# EAGLE board pi3_hat (EAGLE 6.5.0)
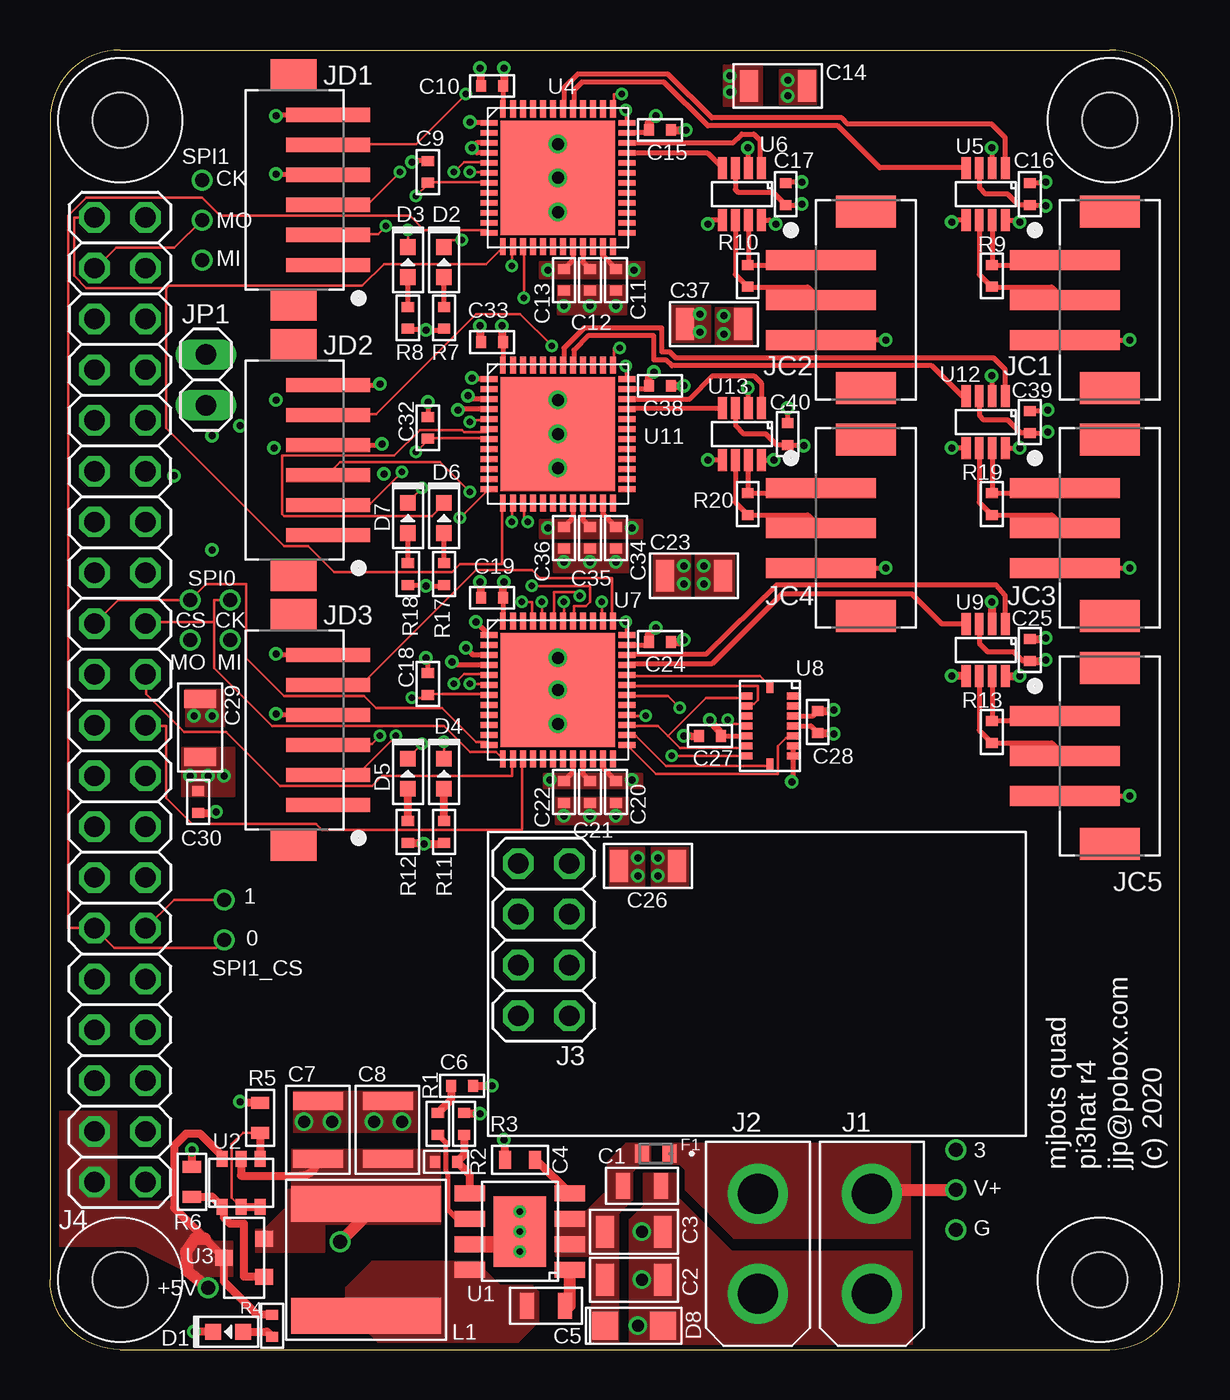
[diagram p0: board, top side]
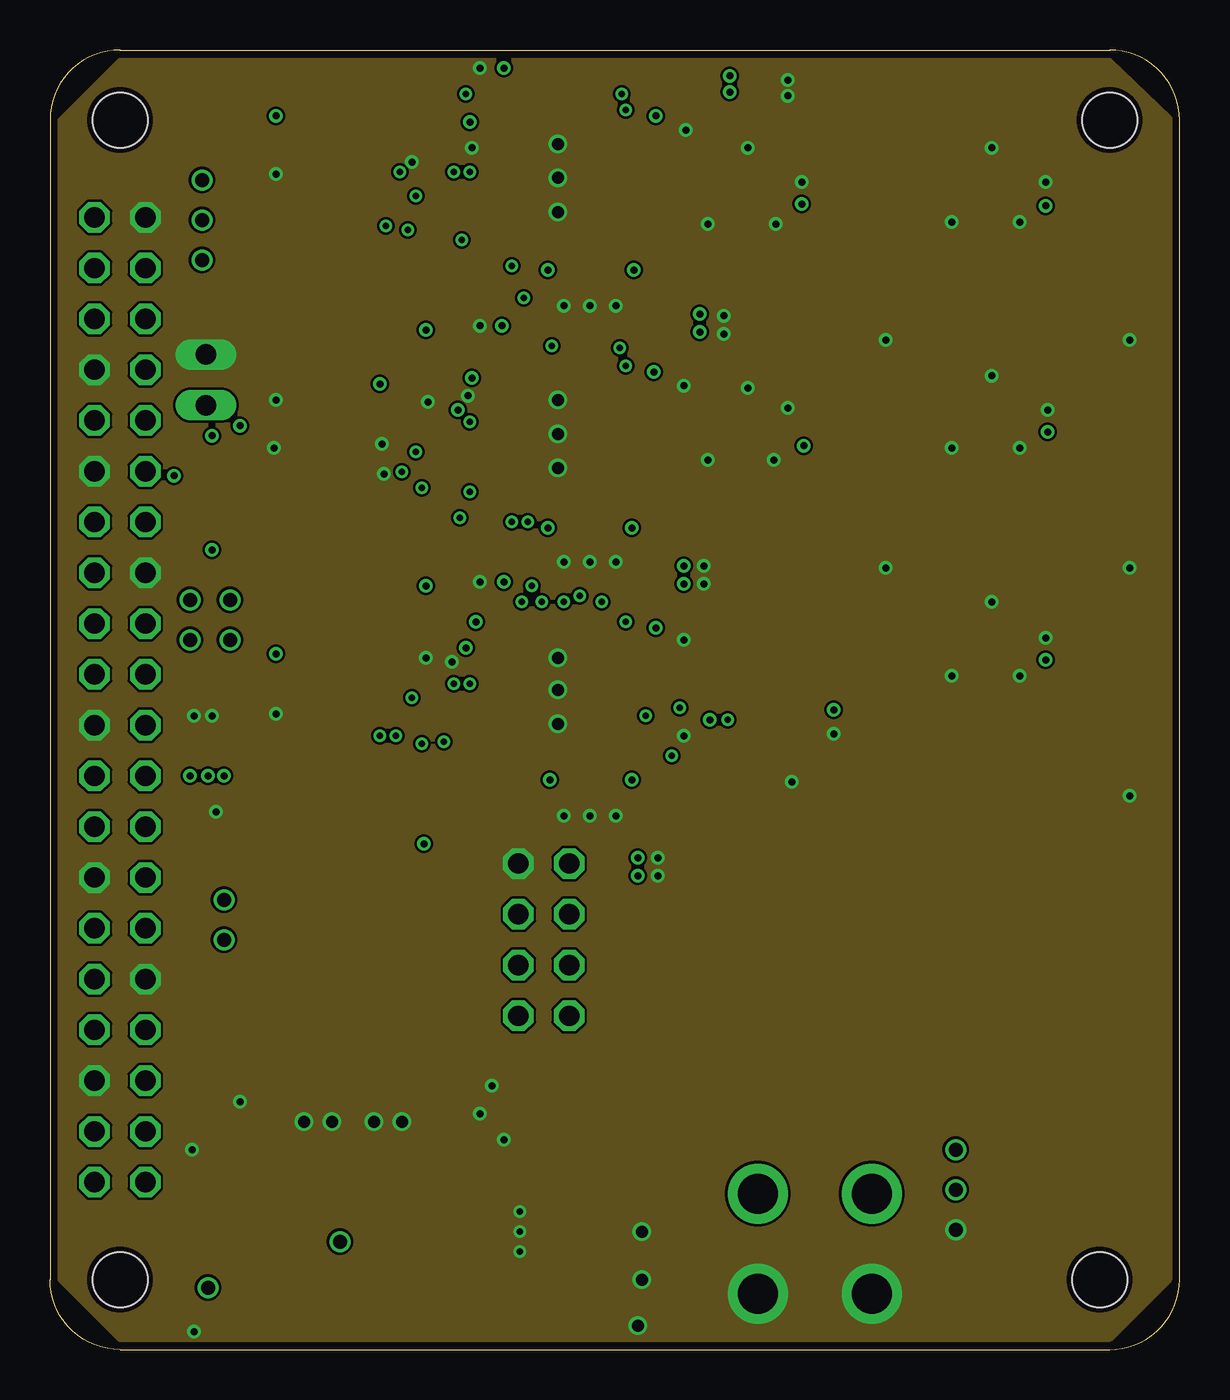
[diagram p1: board, inner layer Route2]
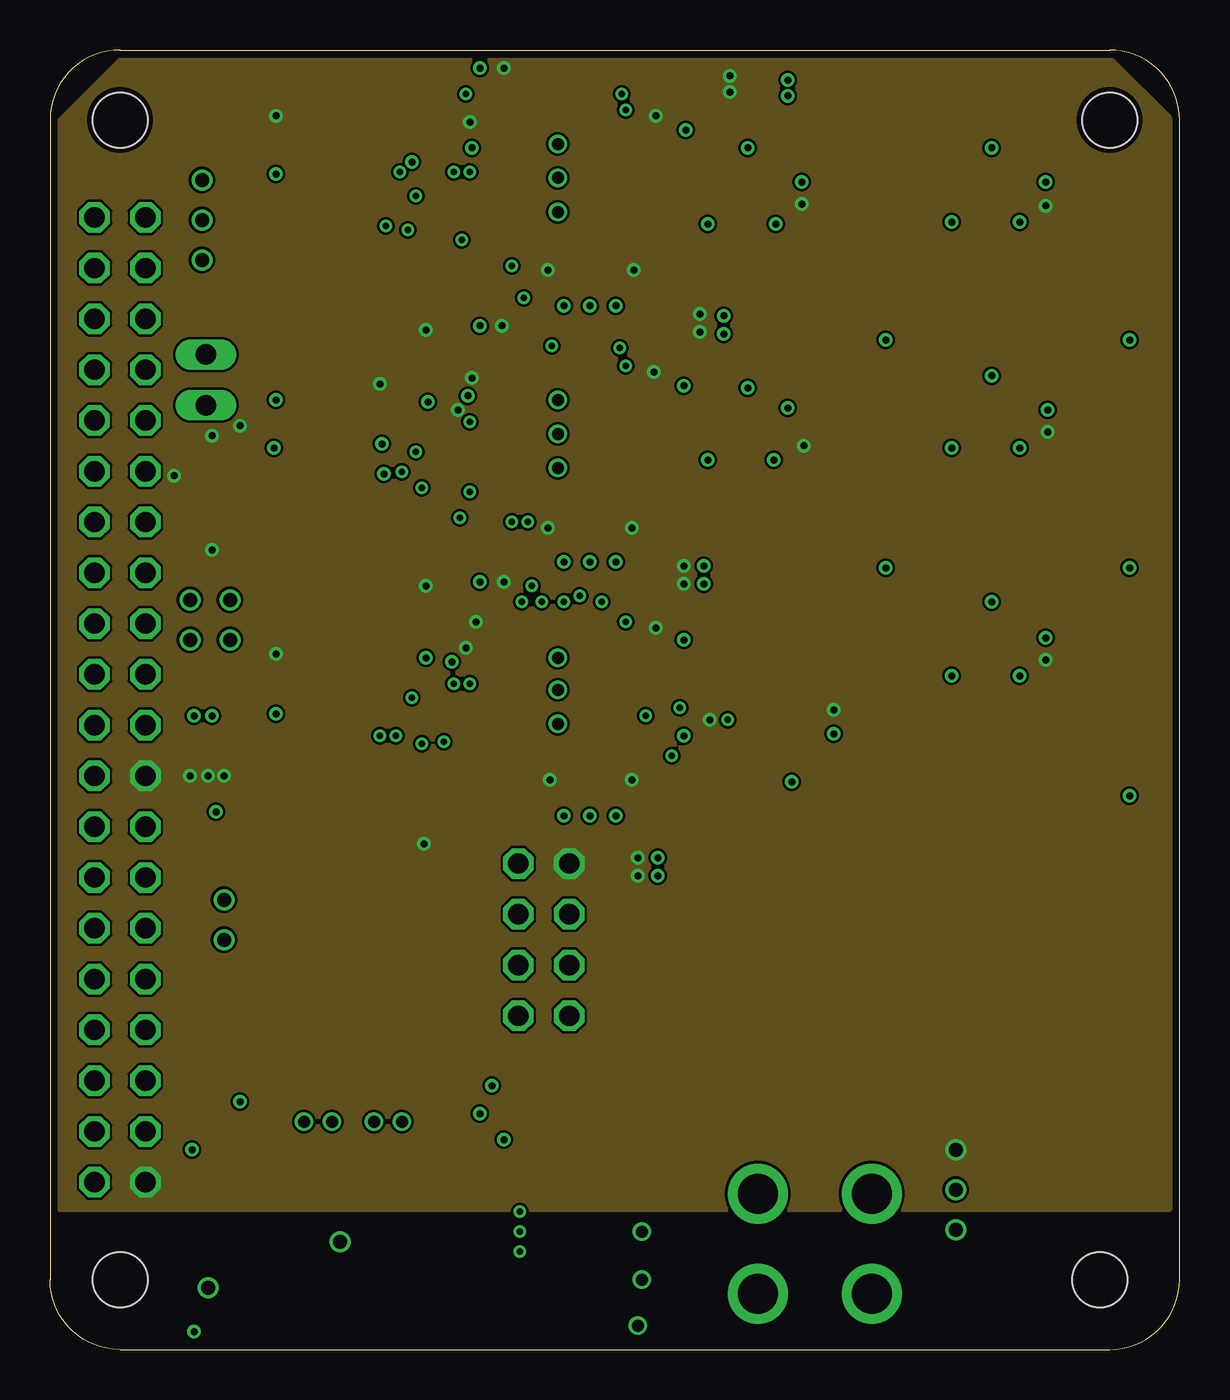
[diagram p2: board, inner layer Route15]
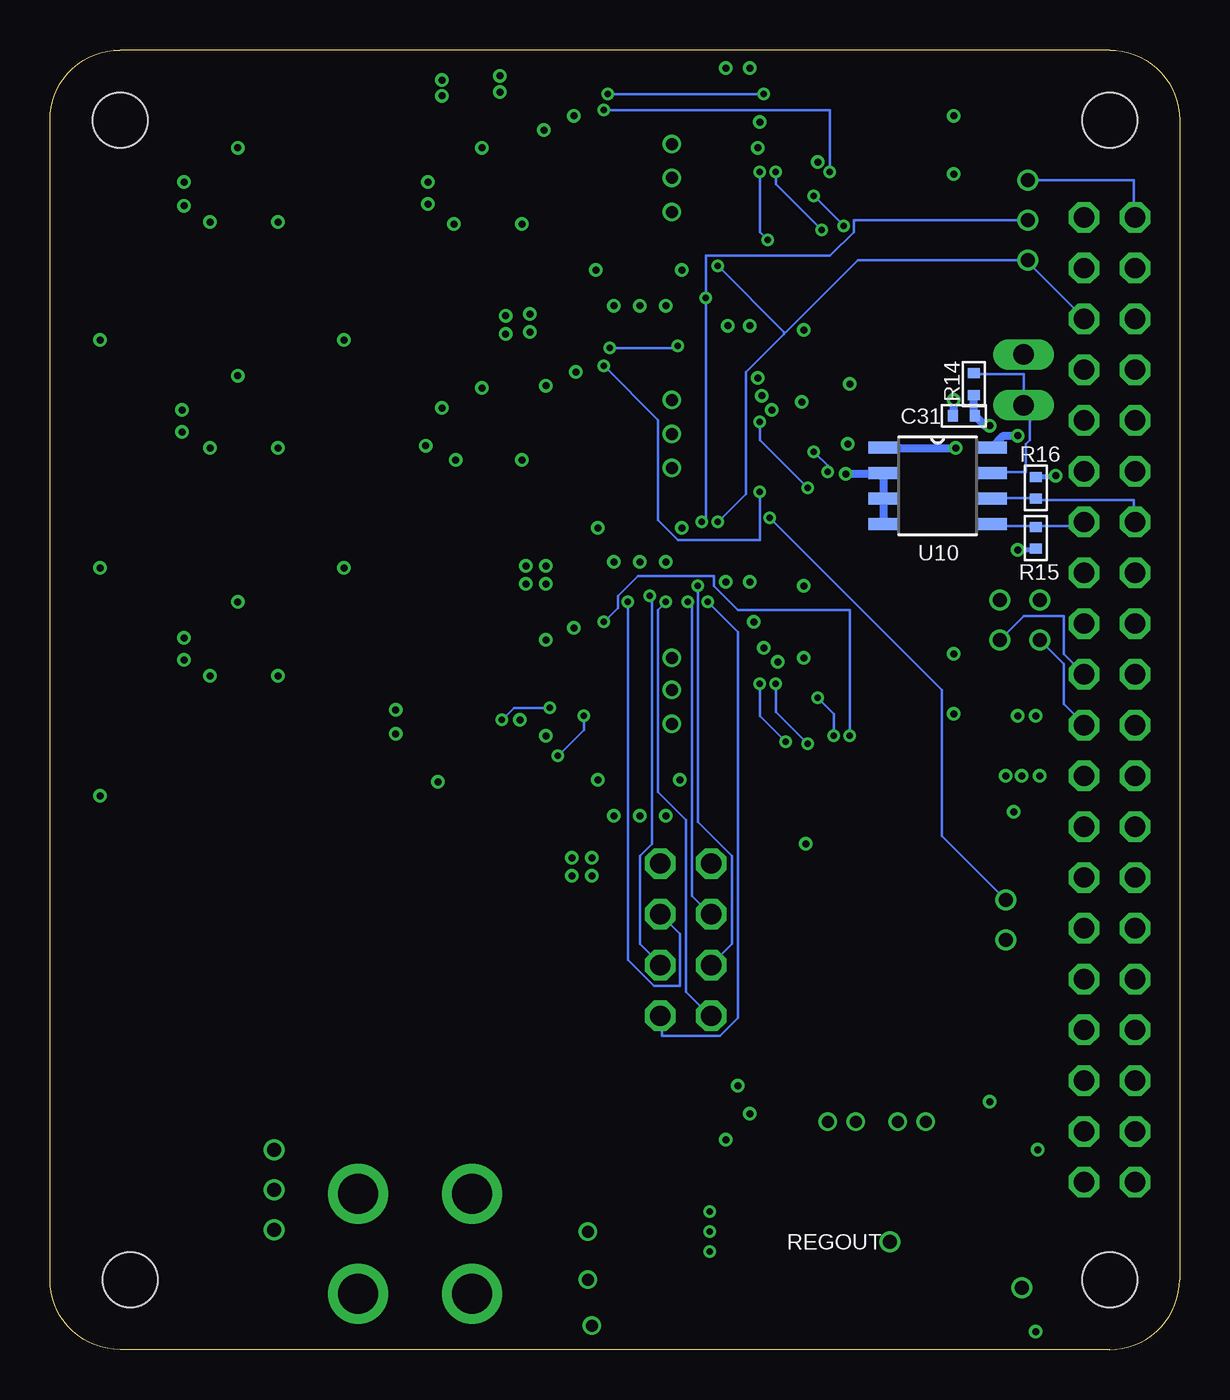
[diagram p3: board, bottom side, seen from below]

Size 56.5 x 65 mm. Coordinates in mm from the lower left corner, seen from the top.
Outline: 3.5,0 53,0 arc90 56.5,3.5 56.5,61.5 arc90 53,65 3.5,65 arc90 0,61.5 0,3.5 arc90 3.5,0
Copper layers (1*2*15*16): Top 0.035mm / dielectric 0.23mm / Route2 0.035mm / dielectric 0.93mm / Route15 0.035mm / dielectric 0.23mm / Bottom 0.035mm
Design rules "MF_Standard_4_Layer": minimum track width 5mil, minimum drill 12mil, track to track 5mil, track to pad 5mil, pad to pad 5mil, via to via 5mil, smd to smd 0mil, copper to edge 10mil, drill to drill 10mil, minimum pad ring 6mil, minimum via ring 6mil, stop-mask expansion 2mil, vias tented up to drill 25mil, thermal gap 10mil
Holes 2.75 mm at 3.5,3.5 3.5,61.5 53,61.5 52.5,3.5

## Footprints (pad centres in the part's own frame; a part is rotated, then mirrored left to right if it is on the bottom)
24AWG_PAD = drill 0.7: P$1 0,0
C0805 = smd 0.7 x 1.3: P$1 -0.95,0; P$2 0.95,0
C1206 = smd 0.9 x 1.6: P$1 -1.45,0; P$2 1.45,0
C0603 = smd 0.6 x 0.9: P$1 -0.75,0; P$2 0.75,0
C0402 = smd 0.5 x 0.6: P$1 -0.55,0; P$2 0.55,0
C1210 = smd 0.9 x 2.5: P$1 -1.45,0; P$2 1.45,0
LED0603 = smd 0.8 x 0.8: ANODE 0.75,0; CATHODE -0.75,0
SMF = smd 1.3 x 1.4: A 1.45,0; C -1.45,0
FUS_VISHAY_MFU0603 = smd 0.699 x 0.94: 1 -0.679,0; 2 0.679,0
XT30P = drill 2: 1 -2.5,0; 2 2.5,0
2X04 = drill 1.016 octagon: 1 -3.81,-1.27; 2 -3.81,1.27; 3 -1.27,-1.27; 4 -1.27,1.27; 5 1.27,-1.27; 6 1.27,1.27; 7 3.81,-1.27; 8 3.81,1.27
2X20 = drill 1.016 octagon: 1 -24.13,-1.27; 2 -24.13,1.27; 3 -21.59,-1.27; 4 -21.59,1.27; 5 -19.05,-1.27; 6 -19.05,1.27; 7 -16.51,-1.27; 8 -16.51,1.27; 9 -13.97,-1.27; 10 -13.97,1.27; 11 -11.43,-1.27; 12 -11.43,1.27; 13 -8.89,-1.27; 14 -8.89,1.27; 15 -6.35,-1.27; 16 -6.35,1.27; 17 -3.81,-1.27; 18 -3.81,1.27; 19 -1.27,-1.27; 20 -1.27,1.27; 21 1.27,-1.27; 22 1.27,1.27; 23 3.81,-1.27; 24 3.81,1.27; 25 6.35,-1.27; 26 6.35,1.27; 27 8.89,-1.27; 28 8.89,1.27; 29 11.43,-1.27; 30 11.43,1.27; 31 13.97,-1.27; 32 13.97,1.27; 33 16.51,-1.27; 34 16.51,1.27; 35 19.05,-1.27; 36 19.05,1.27; 37 21.59,-1.27; 38 21.59,1.27; 39 24.13,-1.27; 40 24.13,1.27
JST_B3B_PH-SM4-TB(LF)(SN) = smd 1 x 5.5: 1 -2,-2.54; 2 0,-2.54; 3 2,-2.54 | smd 1.6 x 3: P1 -4.4,-0.29; P2 4.4,-0.29
JST_B6B-ZR-SM4-TF(LF)(SN) = smd 0.7 x 4.2: 1 -3.75,-2; 2 -2.25,-2; 3 -0.75,-2; 4 0.75,-2; 5 2.25,-2; 6 3.75,-2 | smd 1.5 x 2.3: P1 -5.8,-0.29; P2 5.8,-0.29
1X02 = drill 1.016 long: 1 -1.27,0; 2 1.27,0
TAIYO_8040 = smd 1.8 x 7.5: 1 -2.8,0; 2 2.8,0
R0402 = smd 0.5 x 0.6: P$1 -0.55,0; P$2 0.55,0
R0603 = smd 0.6 x 0.9: P$1 -0.75,0; P$2 0.75,0
SO-8EP = smd 0.802 x 1.505: 1 -1.905,-2.5; 2 -0.635,-2.5; 3 0.635,-2.5; 4 1.905,-2.5; 5 1.905,2.5; 6 0.635,2.5; 7 -0.635,2.5; 8 -1.905,2.5 | drill 0.305: P1 -1,0; P2 0,0; P3 1,0 | smd 3.502 x 2.613: PAD 0,0
SOT26 = smd 0.55 x 0.8: 1 -0.95,-1.2; 2 0,-1.2; 3 0.95,-1.2; 4 0.95,1.2; 5 0,1.2; 6 -0.95,1.2
SOT23 = smd 0.8 x 0.9: 1 -0.95,-1; 2 0.95,-1; 3 0,1
QFN50P700X700X60-49N = smd 0.85 x 0.3: 1 -3.45,2.75; 2 -3.45,2.25; 3 -3.45,1.75; 4 -3.45,1.25; 5 -3.45,0.75; 6 -3.45,0.25; 7 -3.45,-0.25; 8 -3.45,-0.75; 9 -3.45,-1.25; 10 -3.45,-1.75; 11 -3.45,-2.25; 12 -3.45,-2.75; 25 3.45,-2.75; 26 3.45,-2.25; 27 3.45,-1.75; 28 3.45,-1.25; 29 3.45,-0.75; 30 3.45,-0.25; 31 3.45,0.25; 32 3.45,0.75; 33 3.45,1.25; 34 3.45,1.75; 35 3.45,2.25; 36 3.45,2.75 | smd 0.3 x 0.85: 13 -2.75,-3.45; 14 -2.25,-3.45; 15 -1.75,-3.45; 16 -1.25,-3.45; 17 -0.75,-3.45; 18 -0.25,-3.45; 19 0.25,-3.45; 20 0.75,-3.45; 21 1.25,-3.45; 22 1.75,-3.45; 23 2.25,-3.45; 24 2.75,-3.45; 37 2.75,3.45; 38 2.25,3.45; 39 1.75,3.45; 40 1.25,3.45; 41 0.75,3.45; 42 0.25,3.45; 43 -0.25,3.45; 44 -0.75,3.45; 45 -1.25,3.45; 46 -1.75,3.45; 47 -2.25,3.45; 48 -2.75,3.45 | smd 5.7 x 5.7: 49 0,0
SOT23-8 = smd 0.45 x 1.1: 1 -0.975,-1.3; 2 -0.325,-1.3; 3 0.325,-1.3; 4 0.975,-1.3; 5 0.975,1.3; 6 0.325,1.3; 7 -0.325,1.3; 8 -0.975,1.3
LGA16 = smd 0.35 x 0.575: 1 -1.5,1.16; 2 -1,1.16; 3 -0.5,1.16; 4 0,1.16; 5 0.5,1.16; 6 1,1.16; 7 1.5,1.16; 9 1.5,-1.16; 10 1,-1.16; 11 0.5,-1.16; 12 0,-1.16; 13 -0.5,-1.16; 14 -1,-1.16; 15 -1.5,-1.16 | smd 0.575 x 0.35: 8 1.915,0; 16 -1.915,0
SOIC8 = smd 1.549 x 0.61: 1 -2.7,1.905; 2 -2.7,0.635; 3 -2.7,-0.635; 4 -2.7,-1.905; 5 2.7,-1.905; 6 2.7,-0.635; 7 2.7,0.635; 8 2.7,1.905

## Placement (x,y rotation side)
3V3_TP  PAD24AWG_PAD  [24AWG_PAD]  45.3,10 0 top
+5V  PAD24AWG_PAD  [24AWG_PAD]  7.9,3.1 0 top
C1  .1uF 50V  [C0805]  29.6,8.2 0 top
C2  10uF 50V  [C1206]  29.2,3.5 0 top
C3  10uF 50V  [C1206]  29.2,5.9 0 top
C4  0.01uF  [C0603]  23.5,9.5 180 top
C5  .1uF 50V  [C0805]  24.8,2.2 180 top
C6  4.7nF  [C0402]  20.6,13.2 0 top
C7  22uF 16V  [C1210]  13.4,11 90 top
C8  22uF 16V  [C1210]  16.9,11 90 top
C9  0.1uF  [C0402]  18.9,58.9 90 top
C10  0.1uF  [C0402]  22.1,63.2 180 top
C11  1uF  [C0402]  28.3,53.5 270 top
C12  0.1uF  [C0402]  27,53.5 270 top
C13  0.1uF  [C0402]  25.7,53.5 270 top
C14  10uF  [C1206]  36.4,63.2 0 top
C15  0.1uF  [C0402]  30.5,61 0 top
C16  0.1uF  [C0402]  49,57.8 90 top
C17  0.1uF  [C0402]  36.8,57.8 90 top
C18  0.1uF  [C0402]  18.9,33.3 90 top
C19  0.1uF  [C0402]  22.1,37.6 180 top
C20  1uF  [C0402]  28.3,27.9 270 top
C21  0.1uF  [C0402]  27,27.9 270 top
C22  0.1uF  [C0402]  25.7,27.9 270 top
C23  10uF  [C1206]  32.2,38.7 0 top
C24  0.1uF  [C0402]  30.5,35.4 0 top
C25  0.1uF  [C0402]  49,35 90 top
C26  10uF  [C1206]  29.9,24.2 0 top
C27  0.1uF  [C0402]  33,30.7 180 top
C28  0.1uF  [C0402]  38.4,31.4 270 top
C29  10uF  [C1206]  7.5,31.1 90 top
C30  0.1uF  [C0402]  7.4,27.4 270 top
C31  0.1uF  [C0402]  10.8,46.7 180 bottom
C32  0.1uF  [C0402]  18.9,46.1 90 top
C33  0.1uF  [C0402]  22.1,50.4 180 top
C34  1uF  [C0402]  28.3,40.6 270 top
C35  0.1uF  [C0402]  27,40.6 270 top
C36  0.1uF  [C0402]  25.7,40.6 270 top
C37  10uF  [C1206]  33.2,51.3 0 top
C38  0.1uF  [C0402]  30.5,48.2 0 top
C39  0.1uF  [C0402]  49,46.4 90 top
C40  0.1uF  [C0402]  36.9,45.8 90 top
D1  MF-LED-0603-RED  [LED0603]  8.9,0.9 0 top
D2  MF-LED-0603-RED  [LED0603]  19.7,54.4 270 top
D3  MF-LED-0603-RED  [LED0603]  17.9,54.4 270 top
D4  MF-LED-0603-RED  [LED0603]  19.7,28.8 270 top
D5  MF-LED-0603-RED  [LED0603]  17.9,28.8 270 top
D6  MF-LED-0603-RED  [LED0603]  19.7,41.6 270 top
D7  MF-LED-0603-RED  [LED0603]  17.9,41.6 270 top
D8  36V  [SMF]  29.2,1.2 0 top
F1  MFU0603FF04000P100  [FUS_VISHAY_MFU0603]  30.3,9.8 180 top
GND  PAD24AWG_PAD  [24AWG_PAD]  45.3,6 0 top
J1  XT30P  [XT30P]  41.1,5.3 90 top
J2  XT30P  [XT30P]  35.4,5.3 90 top
J3  [2X04]  24.7,20.5 90 top
J4  [2X20]  3.5,32.5 90 top
JC1  JST-PH3SMT_VERT  [JST_B3B_PH-SM4-TB(LF)(SN)]  53.3,52.5 270 top
JC2  JST-PH3SMT_VERT  [JST_B3B_PH-SM4-TB(LF)(SN)]  41.1,52.5 270 top
JC3  JST-PH3SMT_VERT  [JST_B3B_PH-SM4-TB(LF)(SN)]  53.3,41.1 270 top
JC4  JST-PH3SMT_VERT  [JST_B3B_PH-SM4-TB(LF)(SN)]  41.1,41.1 270 top
JC5  JST-PH3SMT_VERT  [JST_B3B_PH-SM4-TB(LF)(SN)]  53.3,29.7 270 top
JD1  JST-ZH6SMT_VERT  [JST_B6B-ZR-SM4-TF(LF)(SN)]  11.9,58 90 top
JD2  JST-ZH6SMT_VERT  [JST_B6B-ZR-SM4-TF(LF)(SN)]  11.9,44.5 90 top
JD3  JST-ZH6SMT_VERT  [JST_B6B-ZR-SM4-TF(LF)(SN)]  11.9,31 90 top
JP1  [1X02]  7.8,48.5 270 top
L1  6.8uH 3.7A  [TAIYO_8040]  15.8,4.5 90 top
R1  15k  [R0402]  19.4,11.3 90 top
R2  115k  [R0402]  19.8,9.4 0 top
R3  22.1k  [R0402]  20.7,11.3 90 top
R4  560  [R0402]  11.1,1.2 270 top
R5  10k 1%  [R0603]  10.5,11.6 90 top
R6  53.6k 1%  [R0603]  7.1,8.4 90 top
R7  220  [R0402]  19.7,51.6 90 top
R8  220  [R0402]  17.9,51.6 90 top
R9  120  [R0402]  47.1,53.7 270 top
R10  120  [R0402]  34.9,53.7 270 top
R11  220  [R0402]  19.7,25.9 90 top
R12  220  [R0402]  17.9,25.9 90 top
R13  120  [R0402]  47.1,30.9 270 top
R14  1k  [R0402]  10.3,48.3 90 bottom
R15  4.7k  [R0402]  7.2,40.6 90 bottom
R16  4.7k  [R0402]  7.2,43.1 270 bottom
R17  220  [R0402]  19.7,38.8 90 top
R18  220  [R0402]  17.9,38.8 90 top
R19  120  [R0402]  47.1,42.3 270 top
R20  120  [R0402]  34.9,42.3 270 top
REGOUT  PAD24AWG_PAD  [24AWG_PAD]  14.5,5.4 0 top
SPI0_CS0  PAD24AWG_PAD  [24AWG_PAD]  7,37.5 0 top
SPI0_MISO  PAD24AWG_PAD  [24AWG_PAD]  9,35.5 0 top
SPI0_MOSI  PAD24AWG_PAD  [24AWG_PAD]  7,35.5 0 top
SPI0_SCLK  PAD24AWG_PAD  [24AWG_PAD]  9,37.5 0 top
SPI1_CS0  PAD24AWG_PAD  [24AWG_PAD]  8.7,20.5 0 top
SPI1_CS1  PAD24AWG_PAD  [24AWG_PAD]  8.7,22.5 0 top
SPI1_MISO  PAD24AWG_PAD  [24AWG_PAD]  7.6,54.5 0 top
SPI1_MOSI  PAD24AWG_PAD  [24AWG_PAD]  7.6,56.5 0 top
SPI1_SCLK  PAD24AWG_PAD  [24AWG_PAD]  7.6,58.5 0 top
U1  AP64351SO8EP  [SO-8EP]  23.5,5.9 90 top
U2  DMMT5401  [SOT26]  9.56,8.34 0 top
U3  DMG2305UX  [SOT23]  9.7,4.6 90 top
U4  STM32G474CEU6  [QFN50P700X700X60-49N]  25.4,58.6 0 top
U5  TCAN334GSOT23  [SOT23-8]  46.8,57.8 180 top
U6  TCAN334GSOT23  [SOT23-8]  34.6,57.8 180 top
U7  STM32G474CEU6  [QFN50P700X700X60-49N]  25.4,33 0 top
U8  BMI088LGA16  [LGA16]  36,31.2 270 top
U9  TCAN334GSOT23  [SOT23-8]  46.8,35 180 top
U10  CAT24C32SOIC8  [SOIC8]  12.1,43.2 0 bottom
U11  STM32G474CEU6  [QFN50P700X700X60-49N]  25.4,45.8 0 top
U12  TCAN334GSOT23  [SOT23-8]  46.8,46.4 180 top
U13  TCAN334GSOT23  [SOT23-8]  34.6,45.8 180 top
V+  PAD24AWG_PAD  [24AWG_PAD]  45.3,8 0 top

## Library data of the parts
3V3_TP +5V GND J1 J2 REGOUT SPI0_CS0 SPI0_MISO SPI0_MOSI SPI0_SCLK SPI1_CS0 SPI1_CS1 SPI1_MISO SPI1_MOSI SPI1_SCLK V+ = pi3_hat; POPULATE: 0
C1 C5 = mfpassives; HOUSEPART: 1; MPN: MF-CAP-0805-0.1uF; POPULATE: 1
C2 C3 = mfpassives; MF: TDK; MPN: CGA5L1X7R1H106K160AC; POPULATE: 1
C4 = mfpassives; MPN: MF-CAP-0603-0.01uF; POPULATE: 1
C6 = mfpassives; HOUSEPART: YES; MPN: MF-CAP-0402-4.7nF; POPULATE: 1
C7 C8 = mfpassives; MF: SAMSUNG; MPN: CL32A226KOJNNNE; POPULATE: 1
C9 C10 C12 C13 C15-C19 C21 C22 C24 C25 C27 C28 C30-C33 C35 C36 C38-C40 = mfpassives; HOUSEPART: YES; MPN: MF-CAP-0402-0.1uF; POPULATE: 1
C11 C20 C34 = mfpassives; HOUSEPART: YES; MPN: MF-CAP-0402-1uF; POPULATE: 1
C14 C23 C26 C29 C37 = mfpassives; HOUSEPART: YES; MPN: MF-CAP-1206-10uF; POPULATE: 1
D1 D2 D4 D6 = mfleds; HOUSEPART: YES; MPN: MF-LED-0603-RED; POPULATE: 1; URL: https://factory.macrofab.com/part/MF-LED-0603-RED
D3 D5 D7 = mfleds; HOUSEPART: YES; MPN: MF-LED-0603-GREEN; POPULATE: 1; URL: https://factory.macrofab.com/part/MF-LED-0603-RED
D8 = pi3_hat; MF: Vishay; MPN: SMF36A-E3-08; POPULATE: 1
F1 = pi3_hat; DPN: MFU06034.00CT-ND; MF: VISHAY; MPN: MFU0603FF04000P100; POPULATE: 1; VENDOR: VISHAY
J3 = pinhead; MF: Wurth Elektornik; MPN: 61300821121; POPULATE: 1
J4 = pinhead; MF: Sullins; MPN: PPPC202LFBN-RC; POPULATE: 0
JC1-JC5 = pi3_hat; MF: JST; MPN: B3B-PH-SM4-TB(LF)(SN); POPULATE: 1
JD1-JD3 = pi3_hat; MF: JST; MPN: B6B-ZR-SM4-TF(LF)(SN); POPULATE: 1
JP1 = pinhead; HOUSEPART: YES; MPN: MF-CON-2.54mm-01x02; POPULATE: 1
L1 = pi3_hat; HOUSEPART: 0; MF: TAIYO YUDEN; MPN: NR8040T6R8N; POPULATE: 1
R1 = mfpassives; HOUSEPART: YES; MPN: MF-RES-0402-15K; POPULATE: 1
R2 = mfpassives; MF: YAGEO; MPN: RC0402FR-07115KL; POPULATE: 1
R3 = mfpassives; MF: YAGEO; MPN: RC0402FR-0722K1L; POPULATE: 1
R4 = mfpassives; HOUSEPART: YES; MPN: MF-RES-0402-560; POPULATE: 1
R5 = mfpassives; MF: YAGEO; MPN: RC0402FR-0710KL; POPULATE: 1
R6 = mfpassives; MF: YAGEO; MPN: RC0402FR-0753K6L; POPULATE: 1
R7 R8 R11 R12 R17 R18 = mfpassives; HOUSEPART: YES; MPN: MF-RES-0402-220; POPULATE: 1
R9 R10 R13 R19 R20 = mfpassives; HOUSEPART: YES; MPN: MF-RES-0402-100; POPULATE: 1
R14 = mfpassives; HOUSEPART: YES; MPN: MF-RES-0402-1K; POPULATE: 1
R15 R16 = mfpassives; HOUSEPART: YES; MPN: MF-RES-0402-4.7K; POPULATE: 1
U1 = pi3_hat; MF: DIODES INC; MPN: AP64350SP-13; POPULATE: 1
U2 = pi3_hat; DPN: DMMT5401-FDICT-ND; MF: Didoes Incorporated; MPN: DMMT5401-7-F; POPULATE: 1
U3 = pi3_hat; DPN: DMG2305UX-13DICT-ND; MF: Diodes Incorporated; MPN: DMG2305UX-13; POPULATE: 1
U4 U7 U11 = pi3_hat; DESCRIPTION: STMICROELECTRONICS - STM32G474CEU6 - MCU, 32BIT, 170MHZ, UFQFPN-48; HEIGHT: 0.6mm; MANUFACTURER_NAME: STMicroelectronics; MANUFACTURER_PART_NUMBER: STM32G474CEU6; MF: ST; MOUSER_PART_NUMBER: 511-STM32G474CEU6; MOUSER_PRICE-STOCK: https://www.mouser.com/Search/Refine.aspx?Keyword=511-STM32G474CEU6; MPN: STM32G474CEU6; POPULATE: 1
U5 U6 U9 U12 U13 = pi3_hat; MF: TI; MPN: TCAN334GDCNT; POPULATE: 1
U8 = pi3_hat; MF: BOSCH; MPN: BMI088; POPULATE: 1
U10 = pi3_hat; MF: ON Semiconductor; MPN: CAT24C32WI-GT3; POPULATE: 1

## Nets
5VSW: C5.P$2 L1.1 U1.8
+3V3: 3V3_TP.P$1 C10.P$1 C11.P$1 C12.P$1 C13.P$1 C14.P$1 C15.P$1 C16.P$1 C17.P$1 C19.P$1 C20.P$1 C21.P$1 C22.P$1 C23.P$1 C24.P$1 C25.P$1 C26.P$1 C27.P$1 C28.P$1 C29.P$1 C30.P$1 C31.P$1 C33.P$1 C34.P$1 C35.P$1 C36.P$1 C37.P$1 C38.P$1 C39.P$1 C40.P$1 J3.7 J4.1 J4.17 JD1.6 JD2.6 JD3.6 R7.P$1 R8.P$1 R11.P$1 R12.P$1 R14.P$1 R15.P$1 R16.P$1 R17.P$1 R18.P$1 U4.1 U4.20 U4.21 U4.23 U4.35 U4.48 U5.3 U6.3 U7.1 U7.3 U7.20 U7.21 U7.23 U7.35 U7.48 U8.3 U8.11 U9.3 U10.8 U11.1 U11.4 U11.20 U11.21 U11.23 U11.35 U11.48 U12.3 U13.3
+5V: +5V.P$1 J4.2 J4.4 R4.P$1 U2.6 U3.3
GND: C1.P$2 C2.P$2 C3.P$2 C4.P$2 C6.P$2 C7.P$2 C8.P$2 C9.P$2 C10.P$2 C11.P$2 C12.P$2 C13.P$2 C14.P$2 C15.P$2 C16.P$2 C17.P$2 C18.P$2 C19.P$2 C20.P$2 C21.P$2 C22.P$2 C23.P$2 C24.P$2 C25.P$2 C26.P$2 C27.P$2 C28.P$2 C29.P$2 C30.P$2 C31.P$2 C32.P$2 C33.P$2 C34.P$2 C35.P$2 C36.P$2 C37.P$2 C38.P$2 C39.P$2 C40.P$2 D1.CATHODE D8.A GND.P$1 J1.1 J2.1 J3.8 J4.6 J4.9 J4.14 J4.20 J4.25 J4.30 J4.34 J4.39 JC1.3 JC2.3 JC3.3 JC4.3 JC5.3 JD1.4 JD2.4 JD3.4 JP1.1 R3.P$2 R5.P$2 R6.P$2 U1.7 U1.P1 U1.P2 U1.P3 U1.PAD U4.3 U4.4 U4.49 U5.2 U5.5 U5.8 U6.2 U6.5 U6.8 U7.4 U7.49 U8.4 U8.6 U8.7 U9.2 U9.5 U9.8 U10.1 U10.2 U10.3 U10.4 U11.3 U11.49 U12.2 U12.5 U12.8 U13.2 U13.5 U13.8
I2C1_SCL: J4.5
I2C1_SDA: J4.3
ID_SCL: J4.28 R16.P$2 U10.6
ID_SDA: J4.27 R15.P$2 U10.5
IMU_ACC_INT: U7.32 U8.16
IMU_CS1: U7.31 U8.14
IMU_CS2: U7.25 U8.5
IMU_GYRO_INT: U7.30 U8.12
IMU_MISO: U7.27 U8.10 U8.15
IMU_MOSI: U7.28 U8.9
IMU_SCK: U7.26 U8.8
N$1: R5.P$1 U2.2 U2.3 U2.4
N$2: JC1.1 R9.P$1 U5.7
N$4: JC1.2 R9.P$2 U5.6
N$5: R6.P$1 U2.1 U3.1
N$7: JC2.1 R10.P$1 U6.7
N$8: JC2.2 R10.P$2 U6.6
N$9: D1.ANODE R4.P$2
N$11: U4.33 U6.4
N$13: C9.P$1 JD1.2 U4.7
N$14: C5.P$1 U1.1
N$15: JD1.3 U4.36
N$16: JD1.5 U4.37
N$17: U4.41 U5.4
N$18: U4.42 U5.1
N$19: C4.P$1 U1.4
N$21: C6.P$1 R1.P$2
N$22: R1.P$1 U1.6
N$23: JC3.1 R19.P$1 U12.7
N$24: R2.P$2 R3.P$1 U1.5
N$25: JC3.2 R19.P$2 U12.6
N$26: JC4.1 R20.P$1 U13.7
N$27: JC4.2 R20.P$2 U13.6
N$28: D3.ANODE R8.P$2
N$29: D3.CATHODE U4.5
N$30: D2.ANODE R7.P$2
N$31: D2.CATHODE U4.6
N$32: C32.P$1 JD2.2 U11.7
N$33: JD2.3 U11.36
N$34: JD2.5 U11.37
N$35: D7.ANODE R18.P$2
N$36: D7.CATHODE U11.5
N$37: D6.ANODE R17.P$2
N$38: D6.CATHODE U11.6
N$39: U11.33 U13.4
N$40: U11.34 U13.1
N$41: U11.41 U12.4
N$42: U11.42 U12.1
N$44: JP1.2 R14.P$2 U10.7
N$45: JC5.1 R13.P$1 U9.7
N$46: JC5.2 R13.P$2 U9.6
N$47: C18.P$1 JD3.2 U7.7
N$48: JD3.3 U7.36
N$49: JD3.5 U7.37
N$50: D5.ANODE R12.P$2
N$51: D5.CATHODE U7.5
N$52: D4.ANODE R11.P$2
N$53: D4.CATHODE U7.6
N$54: U7.33 U9.4
N$55: U7.34 U9.1
N$100: U4.34 U6.1
NRF_CE: J3.6 U7.44
NRF_CS: J3.5 U7.38
NRF_IRQ: J3.1 U7.45
NRF_MISO: J3.2 U7.42
NRF_MOSI: J3.3 U7.43
NRF_SCK: J3.4 U7.41
PI_RX_3V: J4.10
PI_TX_3V: J4.8
REGOUT: C7.P$1 C8.P$1 L1.2 R2.P$1 REGOUT.P$1 U2.5 U3.2
SPI0_CS0: J4.24 SPI0_CS0.P$1 U7.12
SPI0_CS1: J4.26
SPI0_MISO: J4.21 SPI0_MISO.P$1 U7.14
SPI0_MOSI: J4.19 SPI0_MOSI.P$1 U7.15
SPI0_SCLK: J4.23 SPI0_SCLK.P$1 U7.13
SPI1_CS0: J4.12 SPI1_CS0.P$1 U4.12
SPI1_CS1: J4.11 SPI1_CS1.P$1 U11.12
SPI1_CS2: J4.36
SPI1_MISO: J4.35 SPI1_MISO.P$1 U4.14 U11.14
SPI1_MOSI: J4.38 SPI1_MOSI.P$1 U4.15 U11.15
SPI1_SCLK: J4.40 SPI1_SCLK.P$1 U4.13 U11.13
V+: F1.1 J1.2 J2.2 V+.P$1
V+FUSED: C1.P$1 C2.P$1 C3.P$1 D8.C F1.2 U1.2 U1.3

## Tracks (layer width: path | path; a pad name or v marks a point on that pad's centre or on a via)
5VSW
  pour Top (no thermals): 20.3,4.4 21.7,4.4 21.7,4 22.5,3.2 24.1,3.2 24.4,2.9 24.4,1.4 23.4,0.4 16.4,0.4 14.8,2 14.8,3.1 16.1,4.4
+3V3  (via drill 0.35)
  Top 0.254: C10.P$1 U4.48 | U4.35 28.9,60.9 29.85,60.9 C15.P$1 | U4.20 26.15,54.5 C13.P$1 | U4.21 26.65,54.4 C12.P$1 | U4.23 27.65,54.7 C11.P$1 | v21,61.4 21.9,61.4 U4.1 | JD1.6 11.35,61.75 v11.3,61.7 | R8.P$1 18.75,51.05 v18.8,51 19.65,51 R7.P$1 | v37.6,57.3 37.65,57.25 C17.P$1 36.15,57.9 34.4,57.9 34.27,58.02 U6.3 | v49.8,57.2 49.75,57.25 C16.P$1 48.45,57.25 47.9,57.8 46.8,57.8 46.5,58.1 46.5,59.08 U5.3 | C33.P$1 U11.48 | U11.4 20.45,47.05 v20.4,47 | U11.1 21.15,48.55 v21.1,48.6 | U11.20 26.15,41.6 C36.P$1 | U11.21 26.65,41.5 C35.P$1 | U11.23 27.65,41.8 C34.P$1 | R18.P$1 18.75,38.25 v18.8,38.2 19.65,38.2 R17.P$1 | JD2.6 16.45,48.25 v16.5,48.3 | U13.3 34.3,47.08 34.3,46.2 34.7,45.8 35.8,45.8 36.35,45.25 C40.P$1 37.65,45.25 v37.7,45.2 | C38.P$1 29.8,48.05 U11.35 | v49.9,45.9 49.85,45.85 C39.P$1 48.55,45.85 47.9,46.5 46.7,46.5 46.5,46.7 46.5,47.67 U12.3 | C19.P$1 U7.48 | v21.3,36.4 U7.1 | U7.3 21.15,34.75 v20.8,35.1 | JD3.6 11.35,34.75 v11.3,34.8 | U7.35 29.9,35.25 C24.P$1 | U7.20 26.15,28.9 C22.P$1 | U7.21 26.65,28.8 C21.P$1 | U7.23 27.65,29.1 C20.P$1 | U8.3 38.15,31.7 C28.P$1 | C27.P$1 U8.11 | C25.P$1 48.65,34.45 48.2,34.9 46.9,34.9 46.5,35.3 46.5,36.27 U9.3
  Top 0.406: v22.7,64.1 22.7,63.25 C10.P$1 | C15.P$1 29.95,61.35 v30.3,61.7 | v22.6,51.2 22.6,50.45 C33.P$1 | C38.P$1 29.95,48.65 v30.2,48.9 | C19.P$1 22.65,38.35 v22.7,38.4 | R12.P$1 18.65,25.35 v18.7,25.3 19.65,25.3 R11.P$1 | C24.P$1 29.95,35.75 v30.3,36.1 | C28.P$1 39.15,31.95 v39.2,32 | C27.P$1 33.55,30.85 v33,31.5 | C25.P$1 49.75,34.45 v49.8,34.5
  Bottom 0.254: v6.2,43.7 6.25,43.65 R16.P$1 | R15.P$1 7.25,40 v8.1,40
  Bottom 0.406: U10.8 8.8,45.7 v8.1,45.7 | v9.5,46.2 9.75,46.2 C31.P$1 10.3,46.75 R14.P$1
  other vias: 34,63.7 34,62.9 29.2,54 24.9,54 29.1,41.1 24.9,41.1 32.5,51.8 32.5,50.9 31.7,39.2 31.7,38.3 29.1,28.5 25,28.5 29.4,24.6 29.4,23.7 7,28.7 7.9,28.7 8.7,28.7
  pour Route15 (no thermals): 0.5,7 0.5,61.5 3.5,64.5 53.1,64.5 56,61.6 56,7
  pour Top (no thermals): 33.7,64.2 35.6,64.2 35.6,62.2 33.7,62.2
  pour Top (no thermals): 24.5,54.4 29.7,54.4 29.7,53.6 24.5,53.6
  pour Top (no thermals): 24.5,41.5 29.6,41.5 29.6,40.6 24.5,40.6
  pour Top (no thermals): 31.1,52.2 33,52.2 33,50.4 31.1,50.4
  pour Top (no thermals): 30.2,39.7 32,39.7 32,37.7 30.2,37.7
  pour Top (no thermals): 24.7,28.8 29.6,28.8 29.6,28.1 24.7,28.1
  pour Top (no thermals): 28,25.1 29.7,25.1 29.7,23.2 28,23.2
  pour Top (no thermals): 6.6,30.1 9.2,30.1 9.2,27.7 6.6,27.7
+5V
  Top 0.406: R4.P$1 10.35,1.75 8.7,3.4 U3.3 7.75,5.55 6.2,7.1 6.2,10.2 6.8,10.8 7.5,10.8 8.61,9.69 U2.6
  Top 0.61: +5V.P$1 6.9,3.9 6.8,4.9 7.25,5.55 7.75,5.55
  pour Top (no thermals): 0.5,11.9 3.3,11.9 3.3,7.4 6.1,7.4 8.2,5.4 9.1,5.4 9.1,3.7 7.3,3.7 4.3,5.2 0.5,5.2
GND  (via drill 0.35, 0.6)
  Top 0.254: U4.4 21.35,59.85 v21.1,60.1 21.35,60.35 U4.3 | C9.P$2 18.15,59.45 v18.1,59.4 | v11.3,58.8 13.85,58.8 JD1.4 | v34.9,60.1 34.9,59.12 U6.2 | v37.6,58.4 36.85,58.4 C17.P$2 | U6.5 33.1,56.5 v32.9,56.3 | U6.8 36,56.5 v36.3,56.3 | C16.P$2 49.75,58.35 v49.8,58.4 | U5.2 47.12,60.08 v47.1,60.1 | U5.5 45.2,56.5 v45.1,56.4 | U5.8 48.4,56.5 v48.5,56.4 | v41.8,50.5 JC2.3 | JC1.3 v54,50.5 | U11.3 21.05,47.55 v20.9,47.7 | v18.9,47.4 C32.P$2 | JD2.4 16.55,45.25 v16.6,45.3 | v34.9,48.1 34.9,47.12 U13.2 | U13.5 v32.9,44.5 | U13.8 v36.2,44.5 | C40.P$2 v36.9,47.1 | U12.2 47.12,48.67 v47.1,48.7 | C39.P$2 49.85,46.95 v49.9,47 | U12.5 v45.1,45.1 | U12.8 v48.5,45.1 | U7.4 20.25,34.25 v20.1,34.4 | C18.P$2 18.9,34.5 v18.8,34.6 | JD3.4 11.35,31.75 v11.3,31.8 | U8.4 38.05,31.2 C28.P$2 | JC4.3 v41.8,39.1 | JC3.3 v54,39.1 | JC5.3 v54,27.7 | v37.1,28.4 37.16,28.46 U8.7 U8.6
  Top 0.406: D1.CATHODE v7.2,0.9 | R5.P$2 9.55,12.35 v9.5,12.4 | R6.P$2 v7.1,10 | C4.P$2 22.75,10.45 v22.7,10.5 | v21.5,11.8 20.75,11.8 R3.P$2 | C6.P$2 v22.1,13.2 | C10.P$2 21.55,64.05 v21.5,64.1 | C15.P$2 v31.8,61 | v21.5,51.2 21.5,50.45 C33.P$2 | C38.P$2 v31.7,48.2 | C19.P$2 21.55,38.35 v21.5,38.4 | C24.P$2 31.7,35.4 v31.7,35.5 | C28.P$2 39.15,30.85 v39.2,30.8 | C27.P$2 32.45,30.65 v31.7,30.7 | C25.P$2 49.75,35.55 v49.8,35.6 | U9.2 47.12,37.38 v47.1,37.4 | U9.5 v45.1,33.7 | U9.8 v48.5,33.7 | C30.P$2 8.25,26.85 v8.3,26.9
  Top 0.813: U1.7 23.5,5.26 U1.P1
  Bottom 0.406: U10.1 v11.2,45.1 | U10.4 U10.3 | v16.7,43.8 14.77,43.8 U10.2 U10.3 | C31.P$2 11.3,46.75 v11.3,47.5 | 14.73,42.5 U10.3
  other vias: 25.4,58.6 25.4,45.8 25.4,33 29.6,5.9 29.6,3.5 29.4,1.2 12.7,11.4 14.1,11.4 16.2,11.4 17.6,11.4 36.9,63.5 36.9,62.7 28.3,52.2 27,52.2 25.7,52.2 28.3,39.4 27,39.4 25.7,39.4 33.7,51.7 33.7,50.8 28.3,26.7 27,26.7 25.7,26.7 32.7,39.2 32.7,38.3 30.4,24.6 30.4,23.7 7.2,31.7 8.1,31.7 25.4,34.6 25.4,31.3 25.4,47.5 25.4,44.1 25.4,60.3 25.4,56.9
  pour Route2 (no thermals): 0.5,3.5 0.5,61.5 3.5,64.5 53,64.5 56,61.6 56,3.5 53,0.5 3.5,0.5
  pour Top (no thermals): 29.8,8.8 31.3,8.8 31.3,7.7 34.1,4.9 43.1,4.9 43.1,0.3 29,0.3 29,6.5 29.7,7.2 29.7,8.8
  pour Top (no thermals): 12.2,12.9 18.3,12.9 18.3,10.9 12.2,10.9
  pour Top (no thermals): 36.5,64 38.3,64 38.3,62.3 36.5,62.3
  pour Top (no thermals): 25.4,53.2 28.8,53.2 28.8,51.8 25.4,51.8
  pour Top (no thermals): 25.2,40.3 28.9,40.3 28.9,38.9 25.2,38.9
  pour Top (no thermals): 33.3,52.1 35.1,52.1 35.1,50.3 33.3,50.3
  pour Top (no thermals): 32.3,39.7 34.2,39.7 34.2,37.7 32.3,37.7
  pour Top (no thermals): 25.3,27.6 28.9,27.6 28.9,26.3 25.3,26.3
  pour Top (no thermals): 30.1,25.1 31.9,25.1 31.9,23.2 30.1,23.2
  pour Top (no thermals): 6.8,33 8.7,33 8.7,31.2 6.8,31.2
ID_SCL
  Bottom 0.127: U10.6 9.4,42.6 7.2,42.6 R16.P$2 7.2,42.5 2.3,42.5 2.3,41.4 J4.28
ID_SDA
  Bottom 0.127: 7.2,41.2 9.4,41.2 U10.5 | 7.2,41.2 4.8,41.2 4.8,41.3 J4.27 | 7.2,41.2 R15.P$2
IMU_ACC_INT
  Top 0.127: U8.16 36,33.2 35.5,33.7 28.9,33.7 U7.32
IMU_CS1
  Top 0.127: U8.14 34.9,32.2 35,32.3 35.2,32.3 35.4,32.5 35.4,33.2 28.9,33.2 U7.31
IMU_CS2
  Top 0.127: U7.25 30.3,28.8 36.4,28.8 36.4,30.2 36.8,30.6 37,30.6 37.1,30.7 U8.5
IMU_GYRO_INT  (via drill 0.3)
  Top 0.127: v33.9,31.5 34.1,31.3 34.7,31.3 34.8,31.2 U8.12 | v31.5,32.1 30.9,32.7 28.9,32.7 U7.30
  Bottom 0.127: v33.9,31.5 33.3,32.1 v31.5,32.1
IMU_MISO
  Top 0.127: 30.9,30.7 30.4,31.2 28.9,31.2 U7.27 | 30.9,30.7 31.5,30.1 34.7,30.1 34.8,30.2 U8.10 | 30.9,30.7 32.8,32.6 34.7,32.6 34.8,32.7 U8.15
IMU_MOSI  (via drill 0.3)
  Top 0.127: v31.1,29.7 U8.9 | v29.8,31.7 28.9,31.7 U7.28
  Bottom 0.127: v31.1,29.7 29.8,31 v29.8,31.7
IMU_SCK
  Top 0.127: U8.8 36,29.2 30.8,29.2 29.3,30.7 28.9,30.7 U7.26
N$1
  Top 0.127: R5.P$1 9.65,10.85 9.07,10.3 9.07,7.6 U2.2
  Top 0.406: U2.2 U2.3 | R5.P$1 U2.4
N$2
  Top 0.254: U5.7 47.12,54.27 R9.P$1 49.45,54.25 49.8,54.6 50.66,54.6 JC1.1
N$4
  Top 0.254: U5.6 46.48,53.77 R9.P$2 50.11,53.15 JC1.2
N$5
  Top 0.406: U3.1 9.7,3.65 9.7,6.3 9,6.3 8.7,6.6 8.7,7.05 U2.1 8.1,7.65 R6.P$1
N$7
  Top 0.254: U6.7 34.92,54.27 R10.P$1 38.31,54.25 JC2.1
N$8
  Top 0.254: U6.6 34.27,53.77 R10.P$2 37.91,53.15 JC2.2
N$9
  Top 0.406: D1.ANODE 10.85,0.9 R4.P$2
N$11
  Top 0.254: U4.33 32.88,59.85 U6.4
N$13  (via drill 0.3)
  Top 0.127: U4.7 21.9,58.4 18.9,58.4 C9.P$1 18.9,58.3 v18.3,57.7 | v16.8,56.2 16.4,55.8 13.9,55.8 JD1.2
  Bottom 0.127: v16.8,56.2 v18.3,57.7
N$14
  Top 0.61: C5.P$1 26,2.2 U1.1
N$15  (via drill 0.3)
  Top 0.127: v28.8,62 28.8,61.4 U4.36 | v17.5,58.9 15.9,57.3 13.9,57.3 JD1.3
  Bottom 0.127: v28.8,62 17.5,62 v17.5,58.9
N$16  (via drill 0.3)
  Top 0.127: v28.6,62.8 28.2,62.8 28.2,62.1 U4.37 | v20.8,62.8 18.3,60.3 13.9,60.3 JD1.5
  Bottom 0.127: v20.8,62.8 v28.6,62.8
N$17
  Top 0.254: U5.4 41.5,59.1 39.4,61.2 32.9,61.2 30.7,63.4 26.6,63.4 26.2,63 26.2,62.1 U4.41
N$18
  Top 0.254: U5.1 47.77,60.62 47.1,61.3 39.9,61.3 39.6,61.6 33.1,61.6 30.9,63.8 26.4,63.8 25.7,63.1 25.7,62.1 U4.42
N$19
  Top 0.406: C4.P$1 24.3,9.5 U1.4
N$21
  Top 0.406: C6.P$1 20.05,12.5 R1.P$2
N$22
  Top 0.254: U1.6 20.36,6.54 19.9,7 19.9,8.8 19.8,8.9 19.8,10.35 R1.P$1
N$23
  Top 0.254: U12.7 47.12,42.88 R19.P$1 50.51,42.85 JC3.1
N$24
  Top 0.406: U1.5 21,8.75 R2.P$2 20.7,9.75 R3.P$1
N$25
  Top 0.254: U12.6 46.48,42.38 R19.P$2 50.11,41.75 JC3.2
N$26
  Top 0.254: U13.7 34.9,44.48 R20.P$1 38.31,42.85 JC4.1
N$27
  Top 0.254: U13.6 34.27,42.38 R20.P$2 37.91,41.75 JC4.2
N$28
  Top 0.254: R8.P$2 D3.ANODE
N$29  (via drill 0.3)
  Top 0.127: v17.9,56 D3.CATHODE | v20.2,58.9 20.7,59.4 21.9,59.4 U4.5
  Bottom 0.127: v17.9,56 20.2,58.3 v20.2,58.9
N$30
  Top 0.254: R7.P$2 D2.ANODE
N$31  (via drill 0.3)
  Top 0.127: v20.6,55.5 20,55.5 19.7,55.2 D2.CATHODE | v21,58.9 21.9,58.9 U4.6
  Bottom 0.127: v20.6,55.5 21,55.9 v21,58.9
N$32  (via drill 0.3)
  Top 0.127: U11.7 21.9,45.6 18.9,45.6 C32.P$1 18.9,45.5 v18.3,44.9 | v17.6,43.9 16,42.3 13.9,42.3 JD2.2
  Bottom 0.127: v18.3,44.9 17.6,44.2 v17.6,43.9
N$33  (via drill 0.3)
  Top 0.127: v28.8,49.2 28.8,48.6 U11.36 | v21,42.9 19.5,44.4 14.5,44.4 13.9,43.8 JD2.3
  Bottom 0.127: v28.8,49.2 26.1,46.5 26.1,41.5 25.1,40.5 21,40.5 v21,42.9
N$34  (via drill 0.3)
  Top 0.127: v28.5,50.1 28.2,50.1 28.2,49.3 U11.37 | v25.1,50.2 23.5,51.8 21.3,51.8 16.3,46.8 13.9,46.8 JD2.5
  Bottom 0.127: v28.5,50.1 25.1,50.1 v25.1,50.2
N$35
  Top 0.254: R18.P$2 D7.ANODE
N$36  (via drill 0.3)
  Top 0.127: v18.6,43.1 17.9,42.4 D7.CATHODE | v21,46.4 21.1,46.5 21.9,46.5 U11.5
  Bottom 0.127: v18.6,43.1 21,45.5 v21,46.4
N$37
  Top 0.254: R17.P$2 D6.ANODE
N$38
  Top 0.127: U11.6 21.8,45.9 20.7,45.9 20.6,46 18.5,46 17.2,44.7 11.6,44.7 11.6,41.8 11.7,41.7 19.1,41.7 19.7,42.3 D6.CATHODE
N$39
  Top 0.254: U11.33 28.9,47.1 U13.4
N$40
  Top 0.254: U11.34 32,47.55 33.15,48.7 35.2,48.7 35.58,48.33 U13.1
N$41
  Top 0.254: U12.4 45.6,47.7 44.1,49.2 31.1,49.2 30.8,49.5 30.2,49.5 30.2,50.7 26.9,50.7 26.2,50 26.2,49.3 U11.41
N$42
  Top 0.254: U12.1 47.77,49.02 47.2,49.6 31.3,49.6 31,49.9 30.6,49.9 30.6,51.1 26.7,51.1 25.7,50.1 25.7,49.3 U11.42
N$44
  Bottom 0.127: R14.P$2 10.3,48.8 7.8,48.8 JP1.2 7.8,47.2 7.5,46.9 7.5,45.5 7.7,45.3 7.7,43.9 9.4,43.9 U10.7
N$45
  Top 0.254: U9.7 47.12,31.48 50.53,31.48 JC5.1
  Top 0.406: 47.12,31.48 R13.P$1
N$46
  Top 0.254: U9.6 46.48,30.98 R13.P$2 50.11,30.35 JC5.2
N$47  (via drill 0.3)
  Top 0.127: U7.7 21.9,32.8 18.9,32.8 C18.P$1 18.9,32.7 18.8,32.6 v18.1,32.6 | v17.3,30.7 15.4,28.8 13.9,28.8 JD3.2
  Bottom 0.127: v18.1,32.6 17.3,31.8 v17.3,30.7
N$48  (via drill 0.3)
  Top 0.127: v28.8,36.4 28.8,35.8 U7.36 | v16.5,30.7 16.1,30.3 13.9,30.3 JD3.3
  Bottom 0.127: v28.8,36.4 28.1,37.1 28.1,37.7 27.1,38.7 23.3,38.7 23.3,38.2 22.1,37 16.5,37 v16.5,30.7
N$49
  Top 0.127: U7.37 28.1,36.5 28.1,38.6 24.5,38.6 24.1,39 21.3,39 15.6,33.3 13.9,33.3 JD3.5
N$50
  Top 0.406: R12.P$2 D5.ANODE
N$51  (via drill 0.3)
  Top 0.127: v18.6,30.3 17.9,29.6 D5.CATHODE | v20.2,33.3 20.7,33.8 21.9,33.8 U7.5
  Bottom 0.127: v18.6,30.3 20.2,31.9 v20.2,33.3
N$52
  Top 0.406: R11.P$2 D4.ANODE
N$53  (via drill 0.3)
  Top 0.127: v19.7,30.4 D4.CATHODE | v21,33.3 21.9,33.3 U7.6
  Bottom 0.127: v19.7,30.4 21,31.7 v21,33.3
N$54
  Top 0.254: U9.4 44.6,36.3 43.1,37.8 36.6,37.8 33.1,34.3 28.9,34.3 U7.33
N$55
  Top 0.254: U9.1 47.77,37.73 47.33,38.25 36.35,38.25 32.8,34.77 28.88,34.77 U7.34
N$100
  Top 0.254: U4.34 34.15,60.35 34.6,60.8 35.2,60.8 35.5,60.5 35.5,59.17 U6.1
NRF_CE  (via drill 0.3)
  Top 0.127: v24.6,37.4 24.6,36.5 U7.44
  Bottom 0.127: v24.6,37.4 24.4,37.2 24.4,22.7 23.5,21.8 J3.6
NRF_CS  (via drill 0.3)
  Top 0.127: v27.6,37.4 27.6,36.5 U7.38
  Bottom 0.127: v27.6,37.4 27.6,19.5 26.3,18.2 25,18.2 25,20.8 J3.5
NRF_IRQ  (via drill 0.3)
  Top 0.127: v23.6,37.4 24.1,37.4 24.1,36.5 U7.45
  Bottom 0.127: v23.6,37.4 22.1,35.9 22.1,16.6 23,15.7 25.9,15.7 25.9,16.6 J3.1
NRF_MISO  (via drill 0.3)
  Top 0.127: v25.7,37.4 25.7,36.5 U7.42
  Bottom 0.127: v25.7,37.4 26.1,37 26.1,27.9 24.7,26.5 24.7,17.9 23.5,16.7 J3.2
NRF_MOSI  (via drill 0.3)
  Top 0.127: v26.5,37.7 26.3,37.9 25.2,37.9 25.2,36.5 U7.43
  Bottom 0.127: v26.5,37.7 26.4,37.6 26.4,25.3 27,24.7 27,20.3 26,19.3 J3.3
NRF_SCK  (via drill 0.3)
  Top 0.127: v24.1,38.2 27,38.2 27,37.4 26.8,37.2 26.2,37.2 26.2,36.5 U7.41
  Bottom 0.127: v24.1,38.2 24.1,26.4 22.4,24.7 22.4,20.3 23.4,19.3 J3.4
REGOUT
  Top 0.406: U2.5 9.56,8.7 12.55,8.7 arc90 C7.P$1
  Top 0.61: REGOUT.P$1 15.8,6.7 L1.2
  pour Top (no thermals): 12.1,10 19.5,10 19.5,6.3 12.1,6.3
  pour Top (no thermals): 10.3,6 10.7,6 11.8,7.1 11.8,8 13.7,8 13.7,4.9 10.3,4.9
SPI0_CS0
  Top 0.127: U7.12 21.8,30.4 21.3,30.4 19.6,32.1 16.3,32.1 15.7,32.7 11.7,32.7 9.8,34.6 9.8,38.3 7.8,38.3 SPI0_CS0.P$1 3.4,37.5 2.3,36.4 J4.24
SPI0_MISO
  Top 0.127: U7.14 23.1,29.5 23.1,28.7 16.6,28.7 16.1,28.2 11.5,28.2 8.8,30.9 6.7,30.9 4.8,32.8 4.8,33.7 J4.21
  Bottom 0.127: SPI0_MISO.P$1 7.8,36.7 5.8,36.7 5.8,34.8 J4.21
SPI0_MOSI
  Top 0.127: U7.15 23.6,29.5 23.6,26 13.6,26 13.3,26.3 7.1,26.3 5.8,27.6 5.8,31.2 4.8,31.2 J4.19
  Bottom 0.127: SPI0_MOSI.P$1 5.8,34.3 5.8,32.3 4.8,31.3 J4.19
SPI0_SCLK
  Top 0.127: U7.13 22.3,29.9 21,29.9 19.7,31.2 11.1,31.2 8.2,34.1 8.2,36.4 | 8.2,36.4 8.2,37.5 SPI0_SCLK.P$1 | 8.2,36.4 4.8,36.4 J4.23
SPI1_CS0
  Top 0.127: U4.12 21.8,56 18.7,56 18,56.7 8.5,56.7 7.6,57.6 1.8,57.6 0.9,56.7 0.9,21.1 2.2,21.1 J4.12 3.2,20.1 8.3,20.1 SPI1_CS0.P$1
SPI1_CS1  (via drill 0.3)
  Top 0.127: v20.5,41.6 U11.12 | J4.11 6.2,22.5 SPI1_CS1.P$1
  Bottom 0.127: v20.5,41.6 11.9,33 11.9,25.7 SPI1_CS1.P$1
SPI1_MISO  (via drill 0.3)
  Top 0.127: v23.1,41.4 23.1,42.3 U11.14 | v23.1,54.2 23.1,55.1 U4.14
  Bottom 0.127: v23.1,41.4 21.7,42.8 21.7,48.9 19.8,50.8 | 19.8,50.8 16.1,54.5 SPI1_MISO.P$1 7.6,54.4 4.8,51.6 J4.35 | v23.1,54.2 19.8,50.9 19.8,50.8
SPI1_MOSI  (via drill 0.3)
  Top 0.127: SPI1_MOSI.P$1 6.2,55.1 3.3,55.1 2.3,54.1 J4.38 | v23.9,41.4 23.7,41.4 23.7,42.3 U11.15 | v23.7,52.6 23.7,55.1 U4.15
  Bottom 0.127: v23.9,41.4 23.7,41.6 v23.7,52.6 23.7,54.7 17.5,54.7 16.3,55.9 16.3,56.5 SPI1_MOSI.P$1
SPI1_SCLK
  Top 0.127: 5.8,53.1 5.8,46.1 11.7,40.2 12.9,40.2 14.2,38.9 20.1,38.9 20.5,39.3 22.6,39.3 22.6,42.3 U11.13 | 5.8,53.1 1.8,53.1 1.2,53.7 1.2,56.6 2.2,56.6 J4.40 | U4.13 21.8,54.3 16.7,54.3 15.6,53.2 5.9,53.2 5.8,53.1
  Bottom 0.127: SPI1_SCLK.P$1 2.3,58.5 2.3,56.7 J4.40
V+
  Top 0.61: J1.2 41.3,8 V+.P$1
  pour Top (no thermals): 30.7,10.3 43,10.3 43,5.6 34.2,5.6 31.8,8 31.8,9 31.5,9.3 30.7,9.3
V+FUSED
  pour Top (no thermals): 28.8,10.3 30,10.3 30,9.3 29.5,9.3 29.1,8.9 29.1,7.5 28.4,6.8 28.4,0.4 27.1,0.4 27.1,4.7 25.3,4.7 25.3,6.9 26.8,6.9 27.9,8 27.9,9.4

## Text on the board
tPlace: mjbots quad / pi3hat r4 | jjp@pobox.com | (c) 2020
tNames: SPI1 | CK | MO | MI | SPI0 | CS | CK | MO | MI | 1 | 0 | SPI1_CS | 3 | V+ | G | +5V
bNames: REGOUT